# Altium PCB PCB1.PcbDoc
Units mm, origin at the board's own origin, x right, y up, seen from the top; angles counter-clockwise.
Board outline 50 x 50 mm, 2 copper layers (Top Layer, Bottom Layer); 11 components, 10 nets, 56 pads, 4 vias.
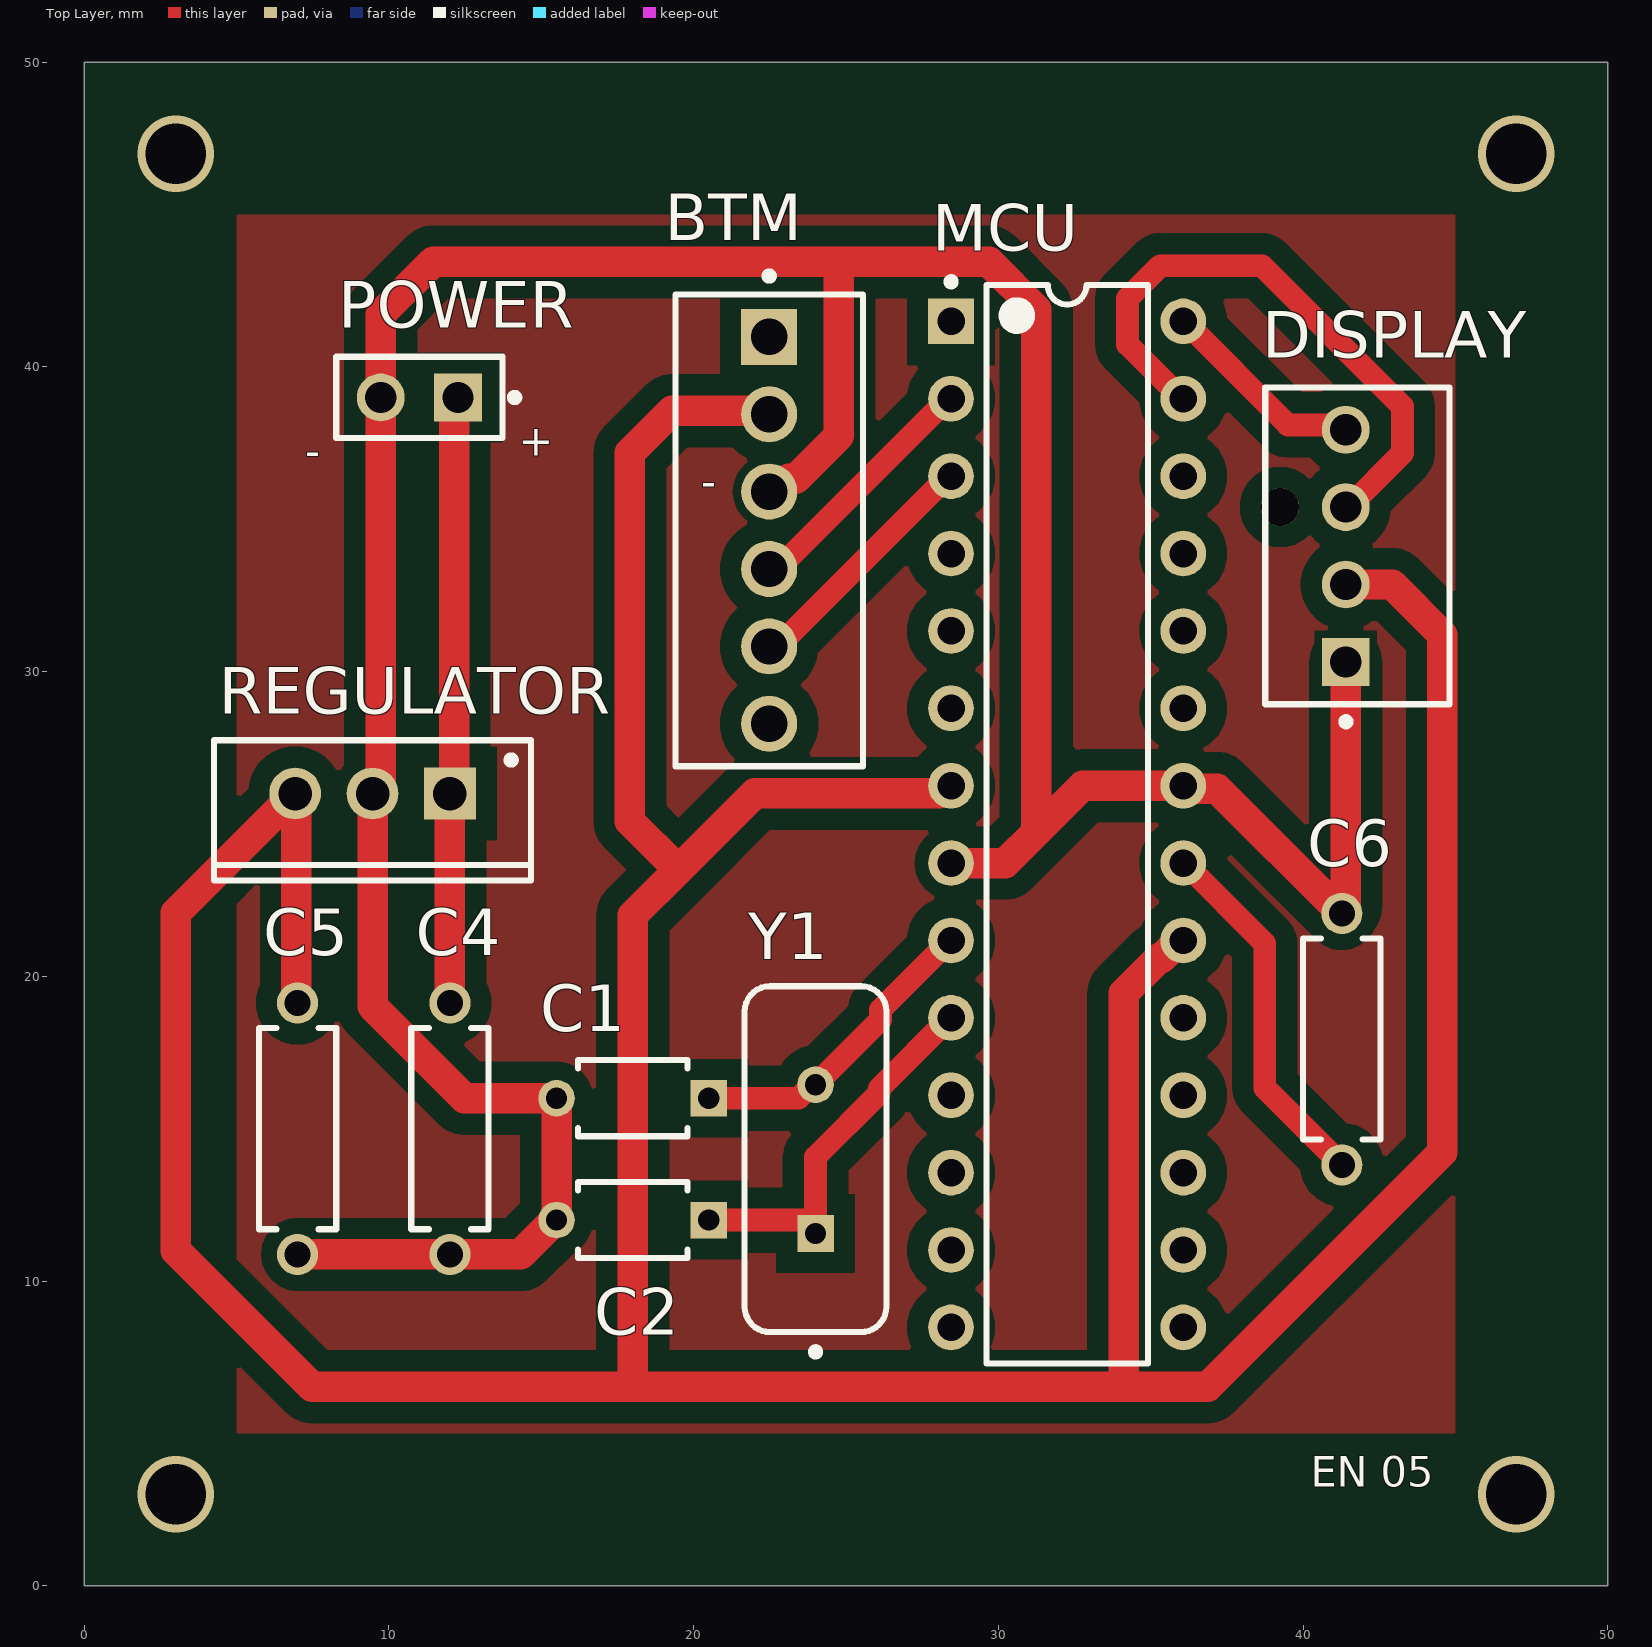
[diagram p0: Top Layer view]
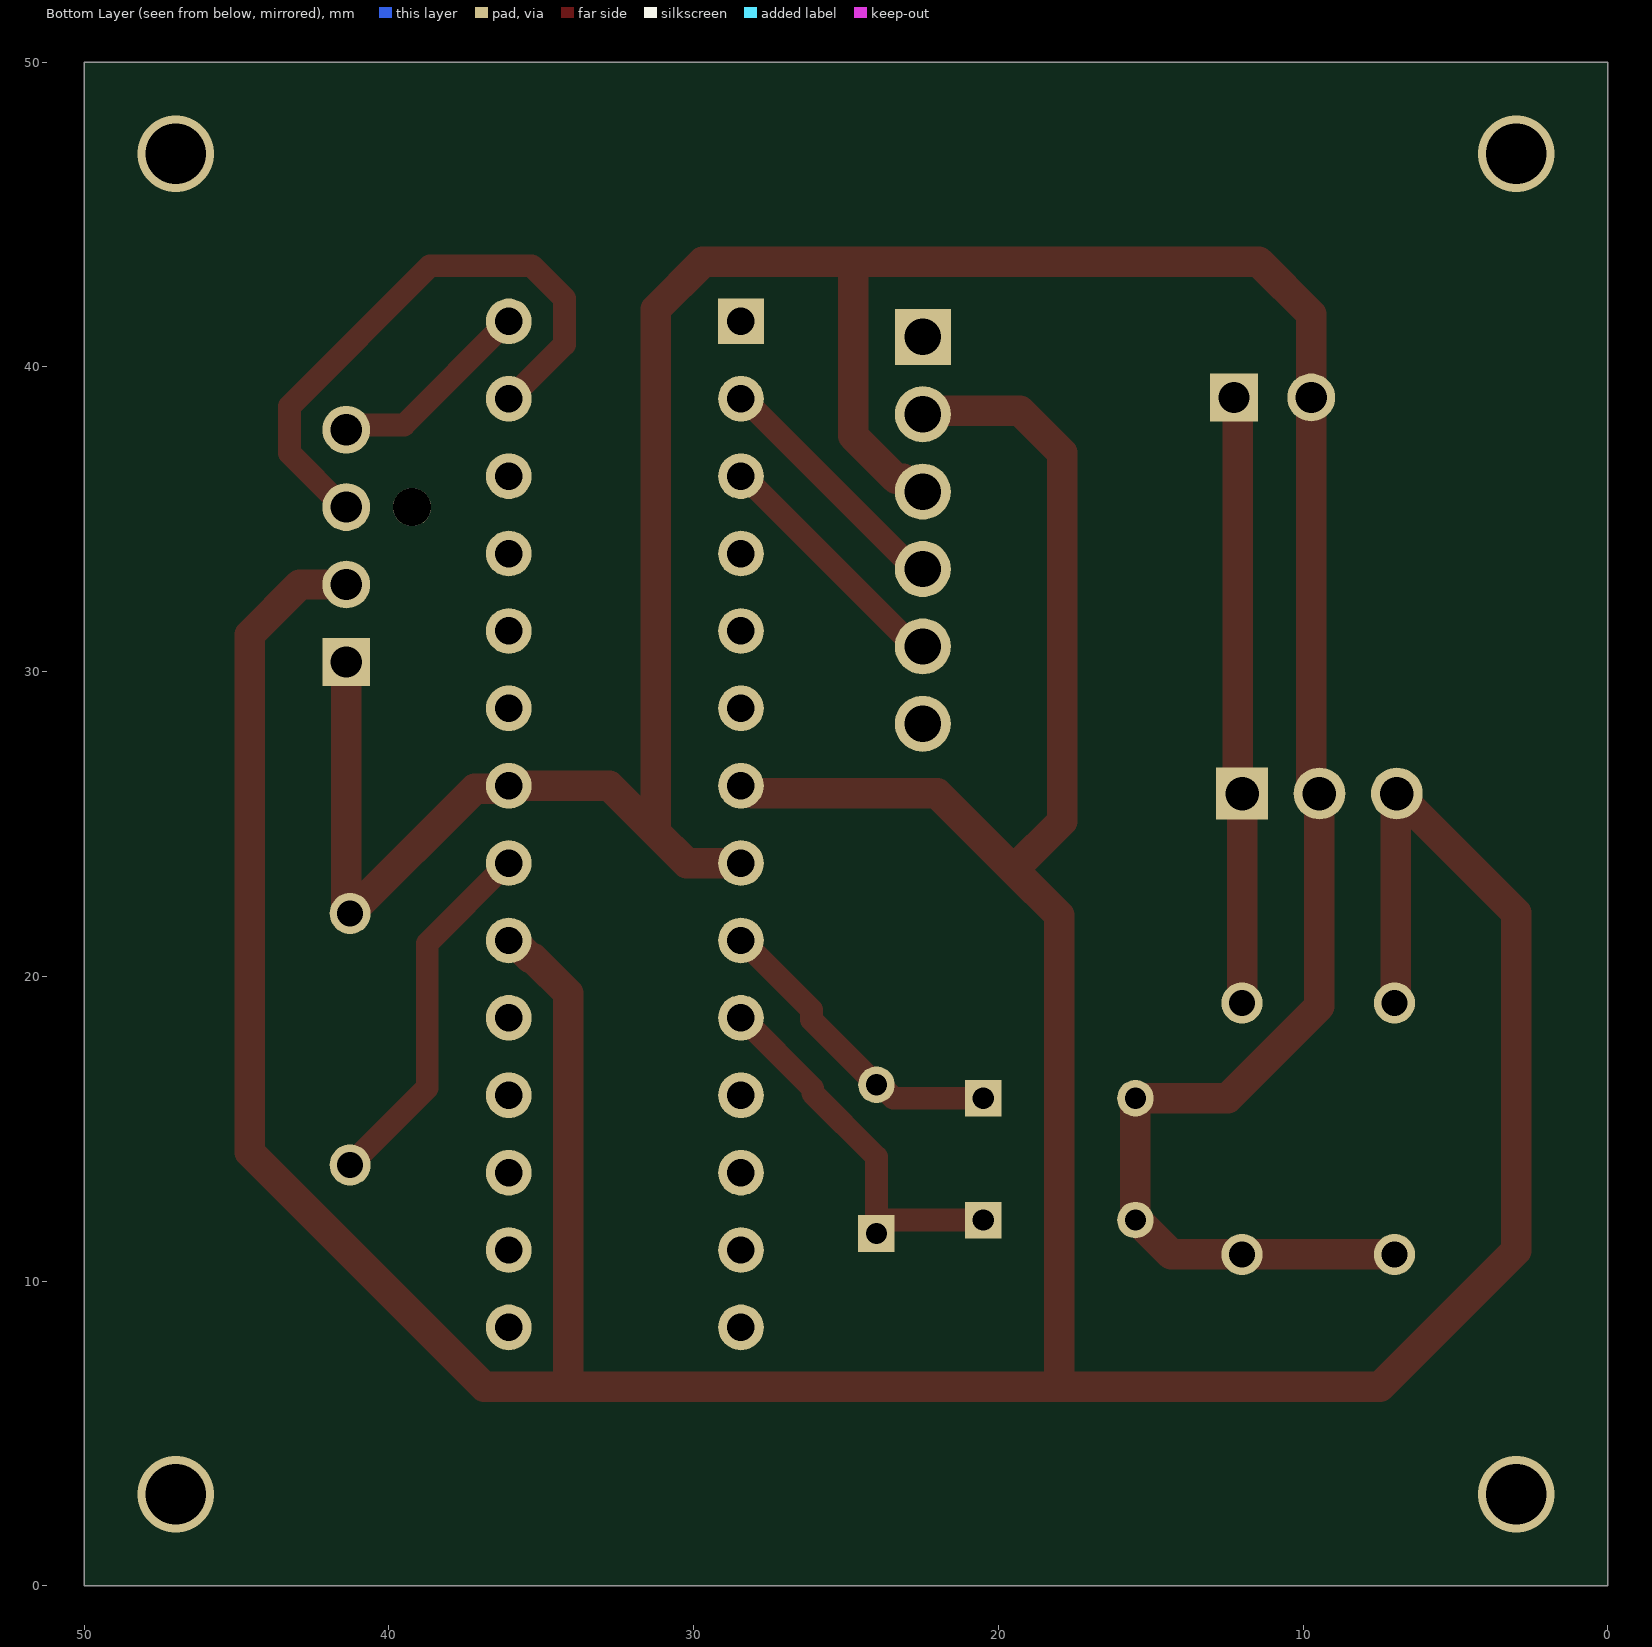
[diagram p1: Bottom Layer view, seen from below]

## Layer stack, top to bottom
Top Solder: solder mask 0.0102, Solder Resist, Dk 3.5
Top Layer: signal copper 0.0356
Dielectric 1: dielectric 0.32, FR-4, Dk 4.8
Bottom Layer: signal copper 0.0356
Bottom Solder: solder mask 0.0102, Solder Resist, Dk 3.5

## Board outline
0,0 50,0 50,50 0,50

## Design rules (kind name [scope] priority, off if disabled: settings)
Clearance [All] p1: gap=0.7 ignorepadtopadclearanceinfootprint=FALSE
PolygonConnect [All] p1: connectstyle=Relief reliefconductorwidth=0.254 reliefentries=4 polygonreliefangle="90 Angle" airgapwidth=0.254
RoutingVias [All] p1: holewidth=0.711 width=1.27 viastyle="Through Hole" minholewidth=0.711 minwidth=1.27 maxholewidth=0.711 maxwidth=1.27
SilkToSilkClearance [All] p1: silktosilkclearance=0.1
SolderMaskExpansion [All] p1: expansion=0.102 istentingtop=FALSE
Width [All] p1: maxlimit=1.2 minlimit=0.75 preferedwidth=1
29 further rules are at their usual default settings.

## Components (designator, comment, footprint, x,y, rotation, side; value= is the part's Value field where it differs from the comment)
BTM "22-27-2061" FP-22-27-2061-MFG 22.479,34.639 r270 top
C1 "22pF" FP-RCE0K1-MFG 18,16 r180 top
C2 "22pF" FP-RCE0K1-MFG 18,12 r180 top
C4 "4.7uF" AVX-MD01 12,15 r90 top
C5 "100nF" AVX-MD01 7,15 r90 top
C6 "100nF" AVX-MD01 41.275,17.939 r270 top
DISPLAY "LCD DISPLAY" FP-47053-3000-MFG 41.782,34.131 r270 top
MCU "ATmega328-PU" 28P3 32.258,24.987 r0 top
POWER "TSW-102-07-L-S" FP-TSW-102-07-L-S-MFG 11,39 r180 top
REGULATOR "L7805CV" TO220 9.46,26 r180 top
Y1 "16MHz" FOX-FOXSLF160-20 24,14 r90 top

## Footprints (in the part's own frame and the unit in brackets; to place one, negate y for a bottom-side part, rotate by r counter-clockwise, add the part's x,y. Pads: shape width x height; smd on the part's side, far side on the other; paste and mask are expansions set on the pad)
28P3 [mm] "28-Pin Plastic Dual In-Line Package (PDIP)"
  rect 1.5x1.5 hole 0.9: 1(-3.81,16.51)
  round 1.5 hole 0.9: 2(-3.81,13.97) 3(-3.81,11.43) 4(-3.81,8.89) 5(-3.81,6.35) 6(-3.81,3.81) 7(-3.81,1.27) 8(-3.81,-1.27) 9(-3.81,-3.81) 10(-3.81,-6.35) 11(-3.81,-8.89) 12(-3.81,-11.43) 13(-3.81,-13.97) 14(-3.81,-16.51) 15(3.81,-16.51) 16(3.81,-13.97) 17(3.81,-11.43) 18(3.81,-8.89) 19(3.81,-6.35) 20(3.81,-3.81) 21(3.81,-1.27) 22(3.81,1.27) 23(3.81,3.81) 24(3.81,6.35) 25(3.81,8.89) 26(3.81,11.43) 27(3.81,13.97) 28(3.81,16.51)
  silkscreen extent -3.93,-17.7 2.65,17.93, body extent -3.6,-17.65 3.6,17.65, height 4.58
AVX-MD01 [mm] "THD, 2-Leads, Body 6.6x2.54mm"
  round 1.35 hole 0.85: 1(-4.127,0) 2(4.127,0)
  silkscreen extent -3.3,-1.27 3.3,1.27, body extent -3.3,-1.27 3.3,1.27, height 4.45
FOX-FOXSLF160-20 [mm] "THD, 2-Leads, Body 11.35x4.65mm"
  rect 1.2x1.2 hole 0.7: 1(-2.44,0)
  round 1.2 hole 0.7: 2(2.44,0)
  silkscreen extent -6.45,-2.32 5.68,2.32, body extent -5.67,-2.32 5.68,2.33, height 3.6
FP-22-27-2061-MFG [mm]
  rect 1.84x1.84 hole 1.19 paste-1000 mask+0: 1(-6.35,0)
  round 1.84 hole 1.19 paste-1000 mask+0: 2(-3.81,0) 3(-1.27,0) 4(1.27,0) 5(3.81,0) 6(6.35,0)
  silkscreen extent -8.47,-3.08 7.75,3.08, body extent -7.85,-3.18 7.85,3.17, height 0.25
FP-47053-3000-MFG [mm]
  rect 1.57x1.57 hole 1.02 paste-1000 mask+0: 1(3.81,-0.38)
  round 1.57 hole 1.02 paste-1000 mask+0: 2(1.27,-0.38) 3(-1.27,-0.38) 4(-3.81,-0.38)
  round 1.25 hole 1.25 unplated paste-1000 mask+0: ""(-1.27,-2.54)
  silkscreen extent -5.2,-3.02 5.9,3.02, body extent -5.3,-3.26 5.3,3.12, height 0.25
FP-RCE0K1-MFG [mm]
  rect 1.2x1.2 hole 0.7 paste-1000 mask+0: 1(-2.5,0)
  round 1.2 hole 0.7 paste-1000 mask+0: 2(2.5,0)
  silkscreen extent -1.8,-1.25 1.8,1.25, body extent -3.2,-1.35 3.2,1.35, height 0.25
FP-TSW-102-07-L-S-MFG [mm]
  rect 1.57x1.57 hole 1.02 paste-1000 mask+0: 1(-1.27,0)
  round 1.57 hole 1.02 paste-1000 mask+0: 2(1.27,0)
  silkscreen extent -3.25,-1.34 2.73,1.34, body extent -2.83,-1.44 2.83,1.44, height 0.25
TO220 [mm] "TO, Thru-Hole, Vertical, Heatsink Mounted; 3 In-Line Leads; Pitch 2.54 mm"
  rect 1.7x1.7 hole 1.1: 1(-2.54,0)
  round 1.7 hole 1.1: 2(0,0) 3(2.54,0)
  silkscreen extent -5.2,-1.75 5.2,2.85, body extent -5.25,-1.8 5.25,2.9, height 19.7

## Part data
BTM: library part CMP-04776-000309-1, "CONN HEADER VERT 6POS 2.54MM", Color=Natural, Contact Resistance=10mR, Current Rating=4A, Flammability Rating="UL94 V-0", Housing Color=White, Max Operating Temperature=75°C, Max Voltage Rating (AC)=250V, Min Operating Temperature=0°C, Package Quantity=10000, Connector Type="Male Pin", Contact Material=Brass, Contact Mating Length=0.295inch, Contact Plating=Tin, Contact Type="Male Pin", Depth=5.8mm, Fastening Type=Friction, Gender=Male, Hole Diameter=1.02mm, Housing Material=Nylon, Lead Pitch=2.54mm, Length=15.24mm, Material=Nylon, Max Current Rating=4A, Mount="Through Hole", Number of Contacts=6, Number of Positions=6, Number of Rows=1, Orientation=Straight, Packaging=Bulk, Pitch=2.54mm, Radiation Hardening=No, REACH SVHC="No SVHC", Series=KK, Termination=Solder, Voltage Rating=250V, Voltage Rating (AC)=250V, Working Voltage=250V
C1 C2: library part CMP-06035-004895-1, "Cap Ceramic 22pF 50V C0G ±5% Radial 5mm +125°C Automotive Bulk", Case/Package=Radial, Dielectric=C0G, Max Operating Temperature=125°C, Min Operating Temperature=-55°C, Package Quantity=2000, Ratings=AEC-Q200, Resistor Type=Ceramic, Tolerance=5%, Voltage Rating=50V, Capacitance=22pF, Height=3.5mm, Height - Seated (Max)=0.138inch, Lead Diameter=0.5mm, Lead Pitch=0.197inch, Lead/Base Style="Formed Leads", Length=0.142inch, Mount="Through Hole", Packaging="Tape and Reel", Termination=Radial, Voltage Rating (DC)=50V, Width=0.098inch
C4: library part CMP-2000-06690-1, "Ceramic Capacitor, 0.1 uF, +/- 20%, 50 V, -55 to 125 degC, 2-Pin THD (MD01), Bulk", Capacitance=100nF, Case Size/Dimension=6.6x3.43x2.54mm, Dielectric=Z5U, Manufacturer=AVX, Package Description="2-Pin Through Hole Device, Body 6.6 x 2.54 mm", Package Reference=AVX-MD01, Rated Voltage=50V, Tolerance (%)=±20%, Datasheet URL=http://datasheets.avx.com/dipguard.pdf, Datasheet Version=08/2015, Manufacturer URL=http://www.avx.com/, Mounting Technology=ThroughHole
C5 C6: library part CMP-2000-06690-1, "Ceramic Capacitor, 0.1 uF, +/- 20%, 50 V, -55 to 125 degC, 2-Pin THD (MD01), Bulk", Case Size/Dimension=6.6x3.43x2.54mm, Dielectric=Z5U, Manufacturer=AVX, Package Description="2-Pin Through Hole Device, Body 6.6 x 2.54 mm", Package Reference=AVX-MD01, Rated Voltage=50V, Tolerance (%)=±20%, Capacitance=100nF, Datasheet URL=http://datasheets.avx.com/dipguard.pdf, Datasheet Version=08/2015, Manufacturer URL=http://www.avx.com/, Mounting Technology=ThroughHole
DISPLAY: library part CMP-04776-000447-1, "CONN HEADER VERT 4POS 2.54MM", Current Rating=4A, Max Operating Temperature=75°C, Min Operating Temperature=0°C, Package Quantity=12000, Voltage Rating=250V, Contact Material="Copper Alloy", Contact Plating=Tin, Gender=Male, Glow Wire Compliant=Non-compliant, Halogen Free="Low Halogen", Mount="Through Hole", Number of Circuits=4, Number of Contacts=4, Number of Positions=4, Number of Rows=1, Orientation=Straight, Packaging=Bulk, Pitch=2.54mm, REACH SVHC="No SVHC", RoHS Compliant=Yes, Series=47053, Termination="Through Hole"
MCU: library part CMP-0095-00015-2, "8-bit AVR Microcontroller, 32KB Flash, 1KB EEPROM, 2KB SRAM, 28-pin PDIP, Industrial Grade (-40°C to 85°C)", ComponentLink1Description="Manufacturer URL", ComponentLink1URL=http://www.atmel.com/, ComponentLink2Description="ATmega48A/48PA/88A/88PA/168A/168PA/328/328P Datasheet", ComponentLink2URL=http://www.atmel.com/dyn/resources/prod_documents/8271.pdf, ComponentLink3Description="ATmega48A/48PA/88A/88PA/168A/168PA/328/328P Summary", ComponentLink3URL=http://www.atmel.com/dyn/resources/prod_documents/8271S.pdf, DatasheetVersion="revD, May-2011", PackageDescription="28-lead (0.300\"/7.62mm Wide) Plastic Dual Inline Package (PDIP)", PackageReference=28P3, PackageVersion="revB, Sep-2001", RevisionNote="DatasheetVersion updated. URLs added."
POWER: library part CMP-02766-001428-1, "CONN HEADER VERT 2POS 2.54MM", Color=Black, Current Rating=7.6A, Max Operating Temperature=125°C, Max Voltage Rating (AC)=550V, Min Operating Temperature=-55°C, Package Quantity=1, Connector Type="Male Pin", Contact Material=Bronze, Contact Mating Length=0.23inch, Contact Plating=Gold, Contact Type="Male Pin", Depth=2.54mm, Gender=Male, Housing Color=Black, Housing Material=Polyester, Lead Free="Lead Free", Length=5.08mm, Max Current Rating=7.6A, Mount="Through Hole", Number of Contacts=2, Number of Positions=2, Number of Rows=1, Orientation=Straight, Packaging=Bulk, Pitch=2.54mm, Radiation Hardening=No, REACH SVHC="No SVHC", RoHS Compliant=Yes, Series=TSW, Termination=Solder, Voltage Rating=550V, Width=2.54mm
REGULATOR: library part CMP-0244-00483-1, "Positive Voltage Regulator, 5V, 3-Pin TO-220", ComponentLink1Description="Manufacturer URL", ComponentLink1URL=http://www.st.com, ComponentLink2Description=Datasheet, ComponentLink2URL=http://www.st.com/internet/com/TECHNICAL_RESOURCES/TECHNICAL_LITERATURE/DATASHEET/CD00000444.pdf, ComponentLink3Description="Package Specification", ComponentLink3URL=http://www.st.com/internet/com/TECHNICAL_RESOURCES/TECHNICAL_LITERATURE/PACKAGE_INFORMATION/CD00004649.pdf, DatasheetVersion=16/11/2011, PackageDescription="TO, Thru-Hole, Vertical, Heatsink Mounted; 3 In-Line Leads; Pitch 2.54 mm", PackageReference=TO220, PackageVersion=ver3.0
Y1: library part CMP-1749-00003-1, "Resistance Weld Thru-Hole Crystal, 16 MHz, -20 to 70 degC, 2-Pin THD, RoHS, Bulk", Case\Package=Axial, Max Operating Temperature="155 degC", Min Operating Temperature="-55 degC", Package Quantity=200, Power Rating="250 mW", Resistance="221 kohm", Tolerance=1%, Voltage Rating="250 V", ComponentLink1Description="Manufacturer URL", ComponentLink1URL=http://www.foxonline.com/, ComponentLink2Description=Datasheet, ComponentLink2URL=http://www.foxonline.com/pdfs/hc49slf.pdf, DatasheetVersion=Mar-15, Length="0.248 inch", Mount="Through Hole", PackageDescription="2-Pin Through Hole Device, Body 11.35 x 4.65 mm", PackageReference=FOXSLF160-20, Packaging=Bulk, RoHSCompliant=true

## Via types
v1: diameter 2.5, hole 2, Top Layer to Bottom Layer, 4 vias

## Nets (pads, with @x,y where several pads share a name; then routed paths per layer and width w, separated by ;. In a path a pad name is that pad's centre, name@x,y a point inside that pad or via, vN(x,y) a via of type N, cw(c..) or ccw(c..) an arc to the next point about the centre after c; other vN are vias at no path point)
5V: BTM.2 C5.2 DISPLAY.2 MCU.7 MCU.20 REGULATOR.3 | length 153.8
  Top Layer w1: C5.2 6.96,19.168 6.96,25.96 REGULATOR.3 3,22.08 3,11 7.473,6.527 18,6.527 ; BTM.2 22.367,38.561 19.289,38.561 17.907,37.179 17.907,25.093 19.5,23.5 ; MCU.7 28.313,26.257 28.059,26.003 22.003,26.003 19.5,23.5 ; MCU.20 35.933,21.177 35.343,20.587 35.26,20.587 34.118,19.445 34.118,6.527 ; DISPLAY.2 42.926,32.861 44.575,31.212 44.575,14.226 36.876,6.527 34.118,6.527 ; 18,6.527 18,22 19.5,23.5 ; 18,6.527 34.118,6.527
GND: BTM.3 C1.2 C2.2 C4.1 C5.1 C6.1 DISPLAY.1 MCU.8 MCU.22 POWER.2 REGULATOR.2 | length 115.8
  Top Layer w1: C5.1 C4.1 14.318,10.873 15.446,12 C2.2 C1.2 12.476,16 9.46,19.016 REGULATOR.2 9.46,26.189 9.73,26.459 POWER.2 9.73,41.73 11.447,43.447 24.72,43.447 ; BTM.3 22.706,35.909 23.126,36.329 23.357,36.329 24.765,37.737 24.765,43.402 24.72,43.447 ; MCU.8 30.226,23.717 31.242,24.733 ; DISPLAY.1 41.402,22.288 41.275,22.161 C6.1 37.18,26.161 36.164,26.161 MCU.22 32.766,26.257 31.242,24.733 ; 24.72,43.447 29.695,43.447 31.242,41.9 31.242,24.733
NetC1_1: C1.1 MCU.9 Y1.2 | length 10.3
  Top Layer w0.75: C1.1 23.438,16 23.878,16.44 Y1.2 26.134,18.574 26.134,18.904 28.407,21.177 MCU.9
NetC2_1: C2.1 MCU.10 Y1.1 | length 12.6
  Top Layer w0.75: C2.1 23.56,12 Y1.1 24,14.071 26.091,16.162 26.091,16.321 28.407,18.637 MCU.10
NetC4_2: C4.2 POWER.1 REGULATOR.1 | length 20
  Top Layer w1: C4.2 REGULATOR.1 12.135,26.135 12.135,38.865 POWER.1
NetC6_2: C6.2 MCU.21 | length 12.1
  Top Layer w0.75: MCU.21 36.109,23.717 38.747,21.079 38.747,16.339 C6.2
RX: BTM.5 MCU.3 | length 8.3
  Top Layer w0.75: BTM.5 22.76,30.829 28.348,36.417 MCU.3
SCL: DISPLAY.4 MCU.28 | length 6.8
  Top Layer w0.75: MCU.28 36.109,41.497 39.508,38.098 41.245,38.098 DISPLAY.4
SDA: DISPLAY.3 MCU.27 | length 19.6
  Top Layer w0.75: MCU.27 36.027,38.957 34.243,40.741 34.243,42.253 35.312,43.322 38.651,43.322 43.262,38.711 43.262,37.171 41.492,35.401 DISPLAY.3
TX: BTM.4 MCU.2 | length 8.3
  Top Layer w0.75: BTM.4 22.76,33.369 28.348,38.957 MCU.2
pads on no net: BTM.1 BTM.6 DISPLAY. MCU.1 MCU.4 MCU.5 MCU.6 MCU.11 MCU.12 MCU.13 MCU.14 MCU.15 MCU.16 MCU.17 MCU.18 MCU.19 MCU.23 MCU.24 MCU.25 MCU.26
copper on no net:
  other v1: 3,3 47,3 3,47 47,47

## Polygon pours and split planes (outlines as drawn)
GND on Top Layer "GND_L01_P000" (solid, pour order 0): 5,45 5,5 45,5 45,45

## Silkscreen, mask and mechanical layers (free items; w line width, h text height)
Top Overlay:
  text "+" at 14.254,37.087 h1
  text "-" at 7.254,36.754 h1
  text "-" at 20.254,35.754 h1
  text "EN 05" at 40.254,3.254 h1